# EAGLE board reagnus (EAGLE 9.6.0)
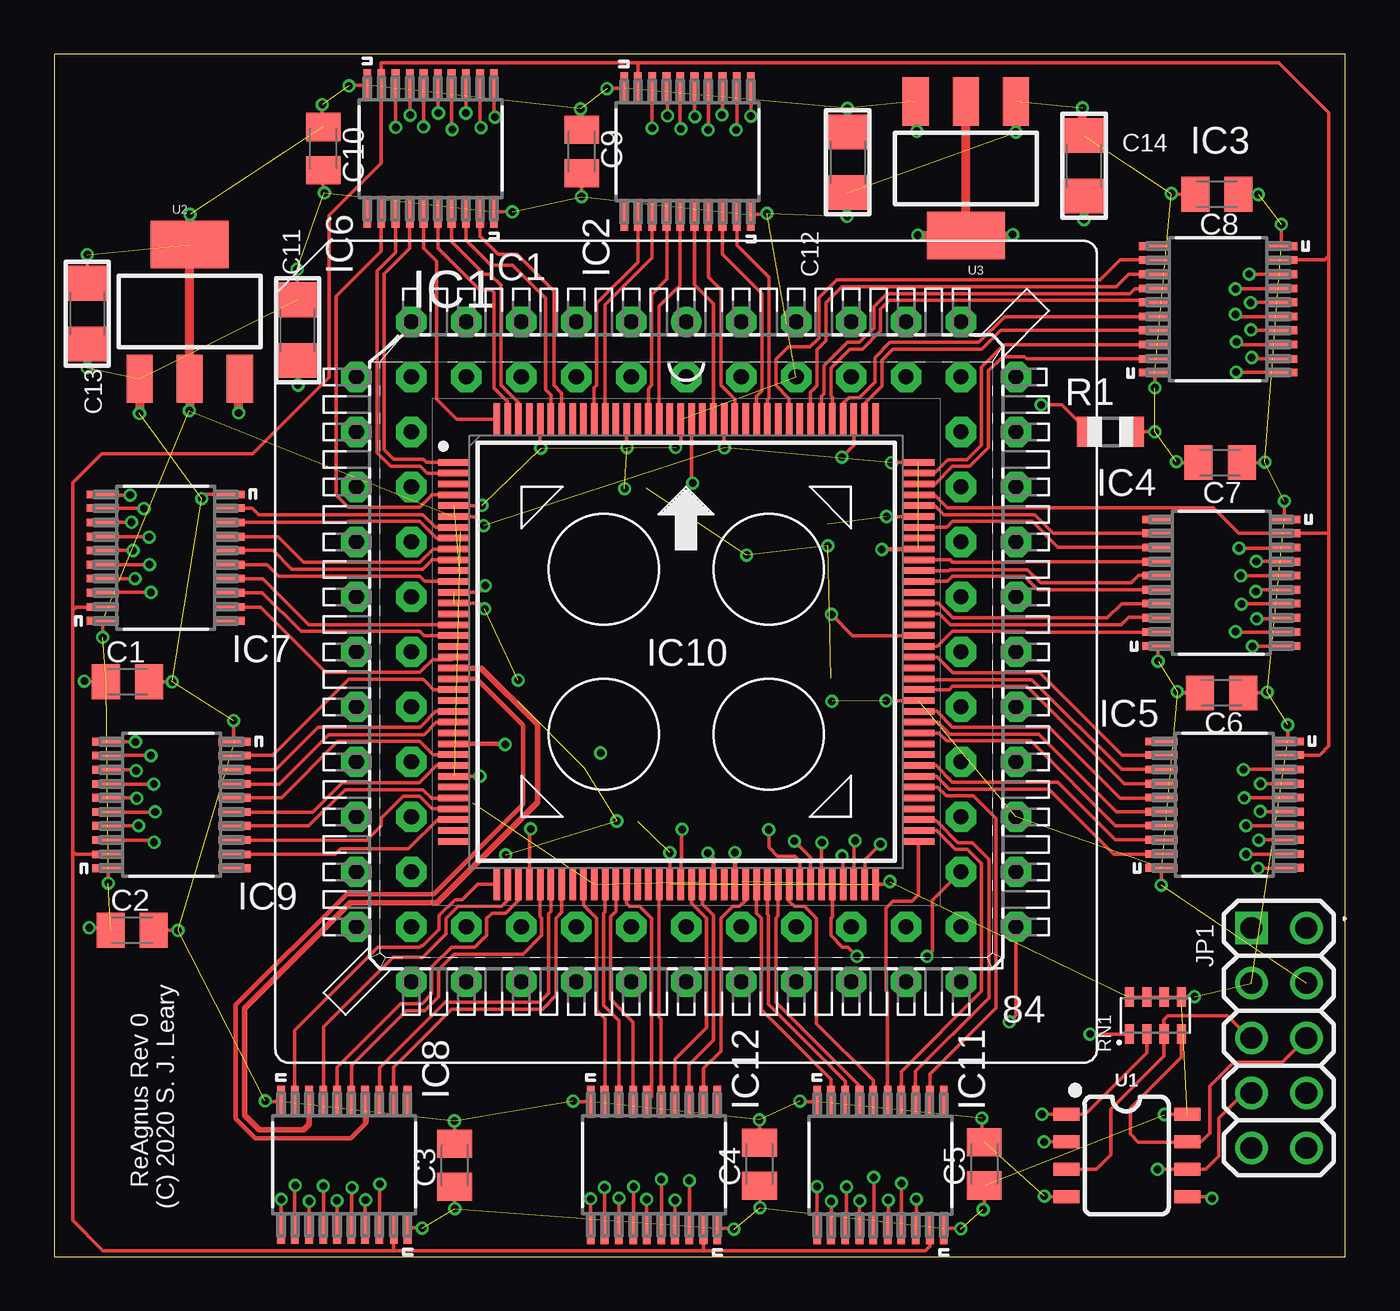
[diagram p0: board, top side]
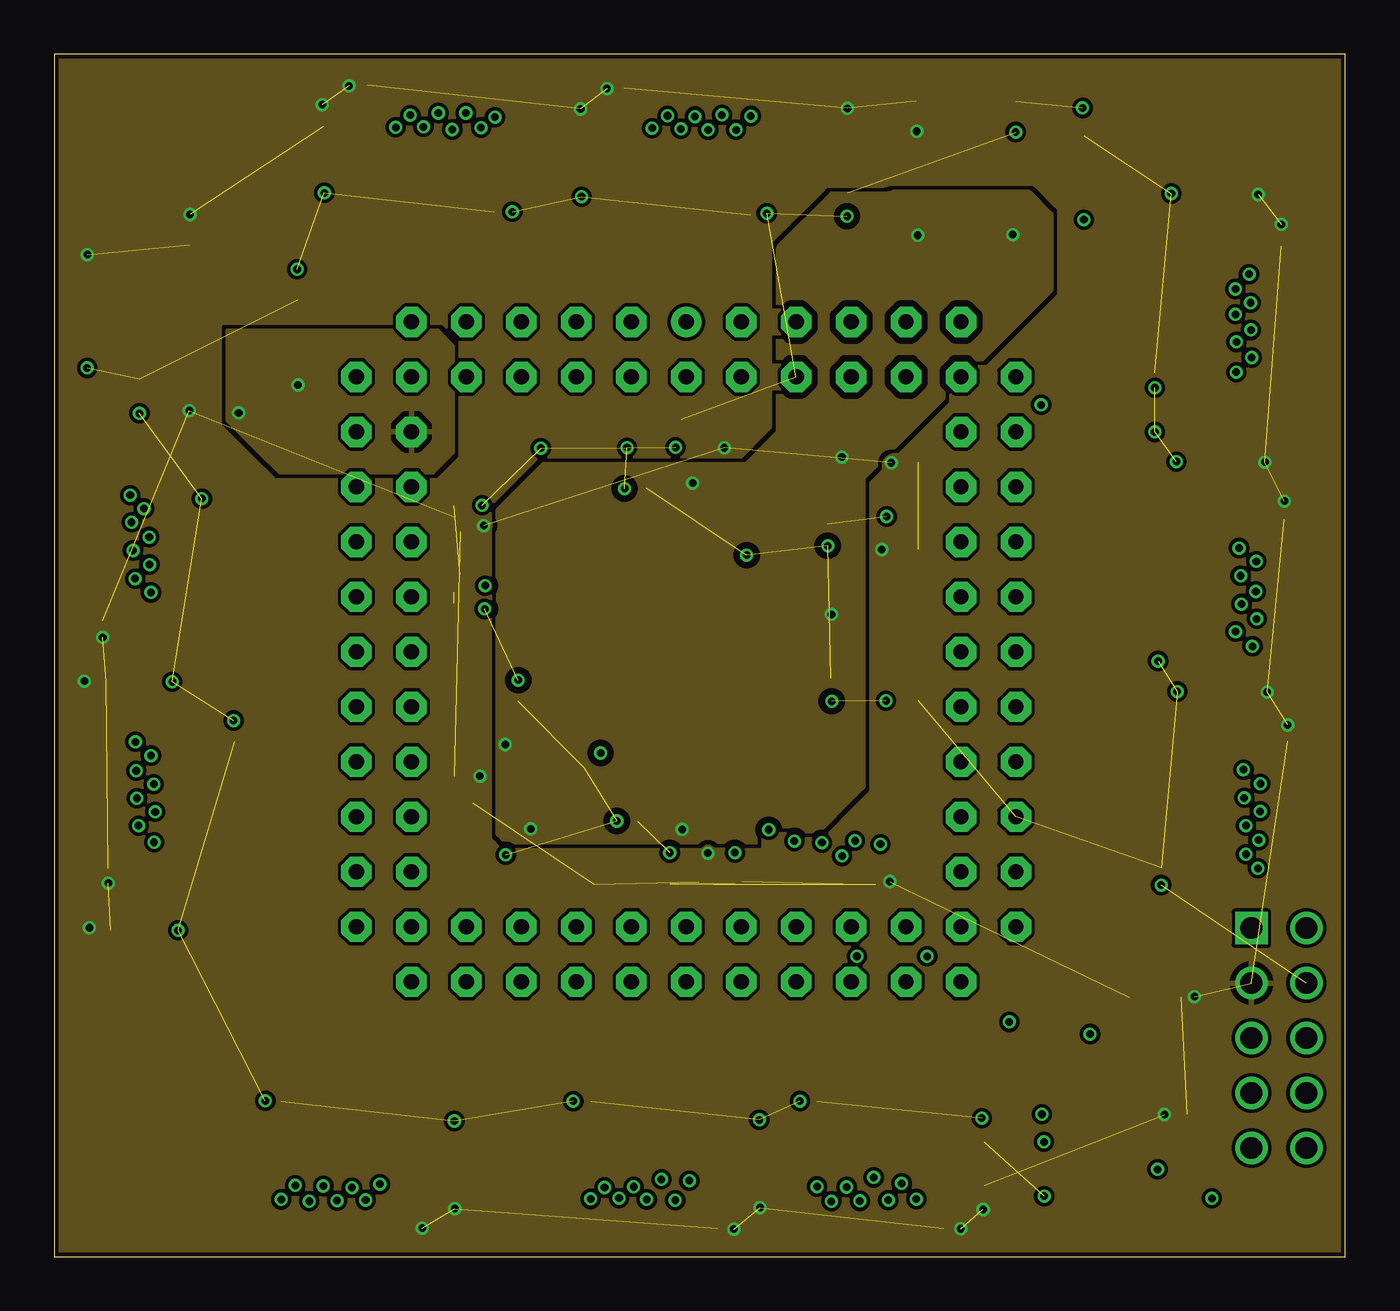
[diagram p1: board, inner layer PWR]
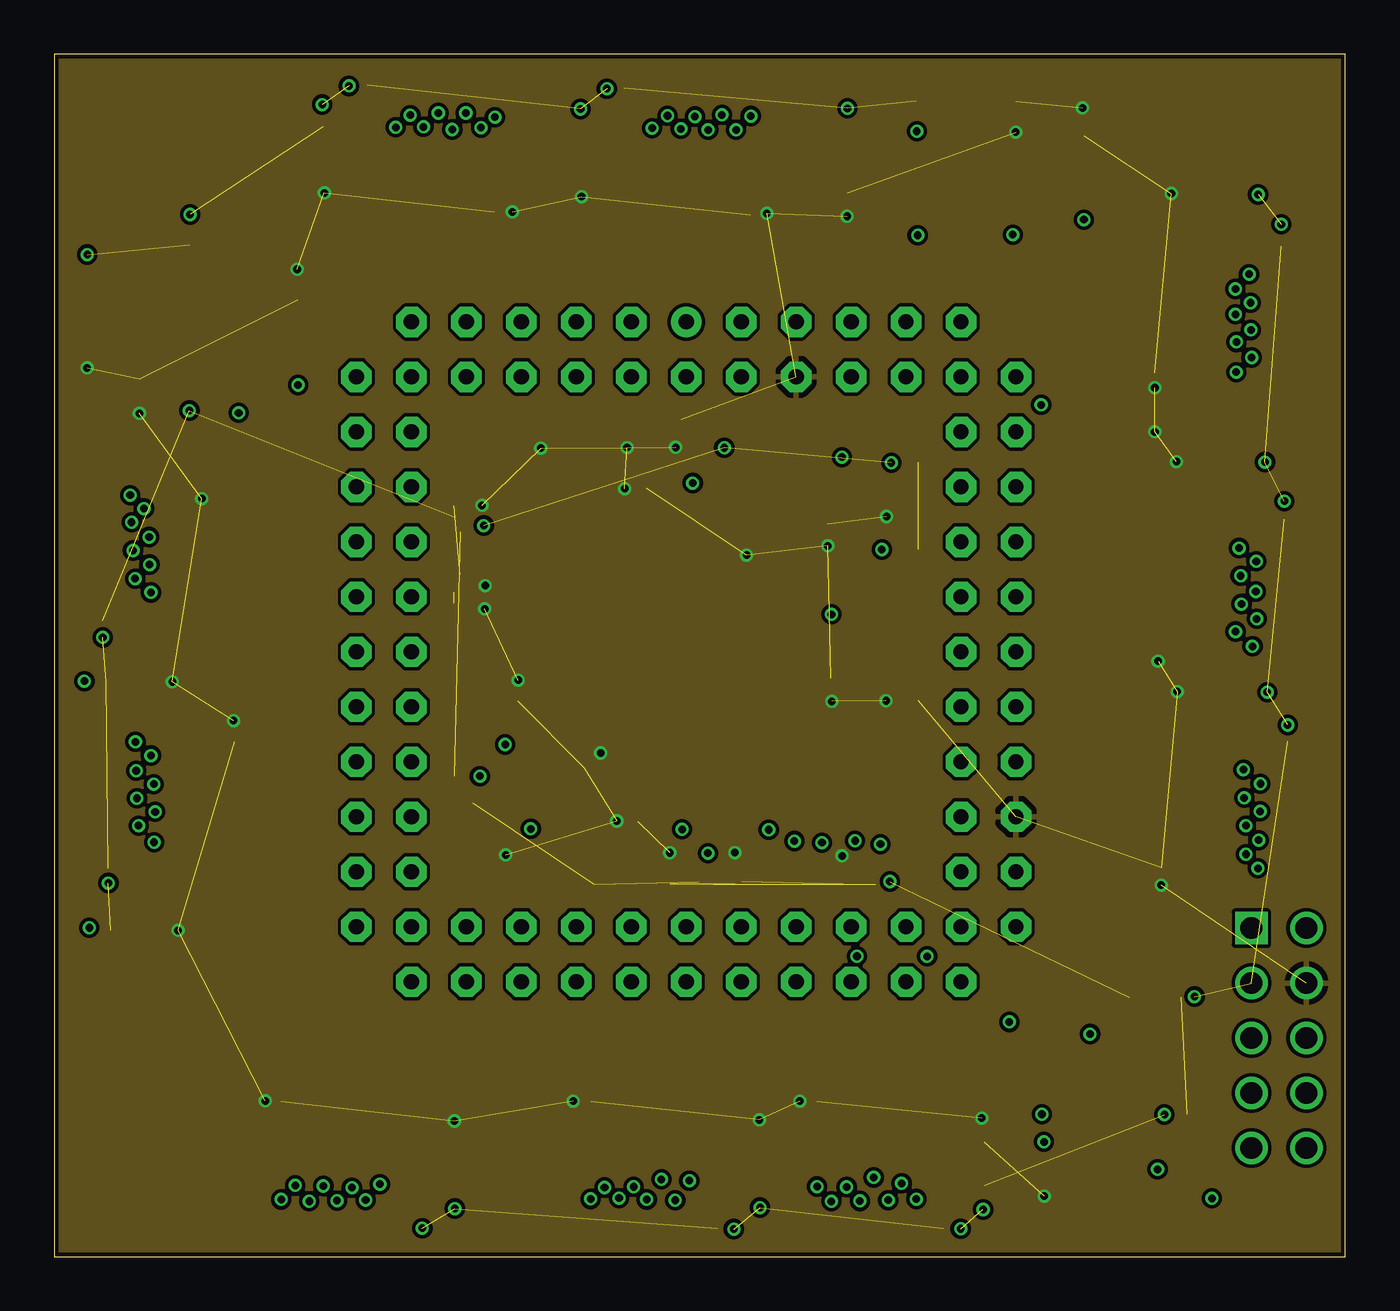
[diagram p2: board, inner layer GND]
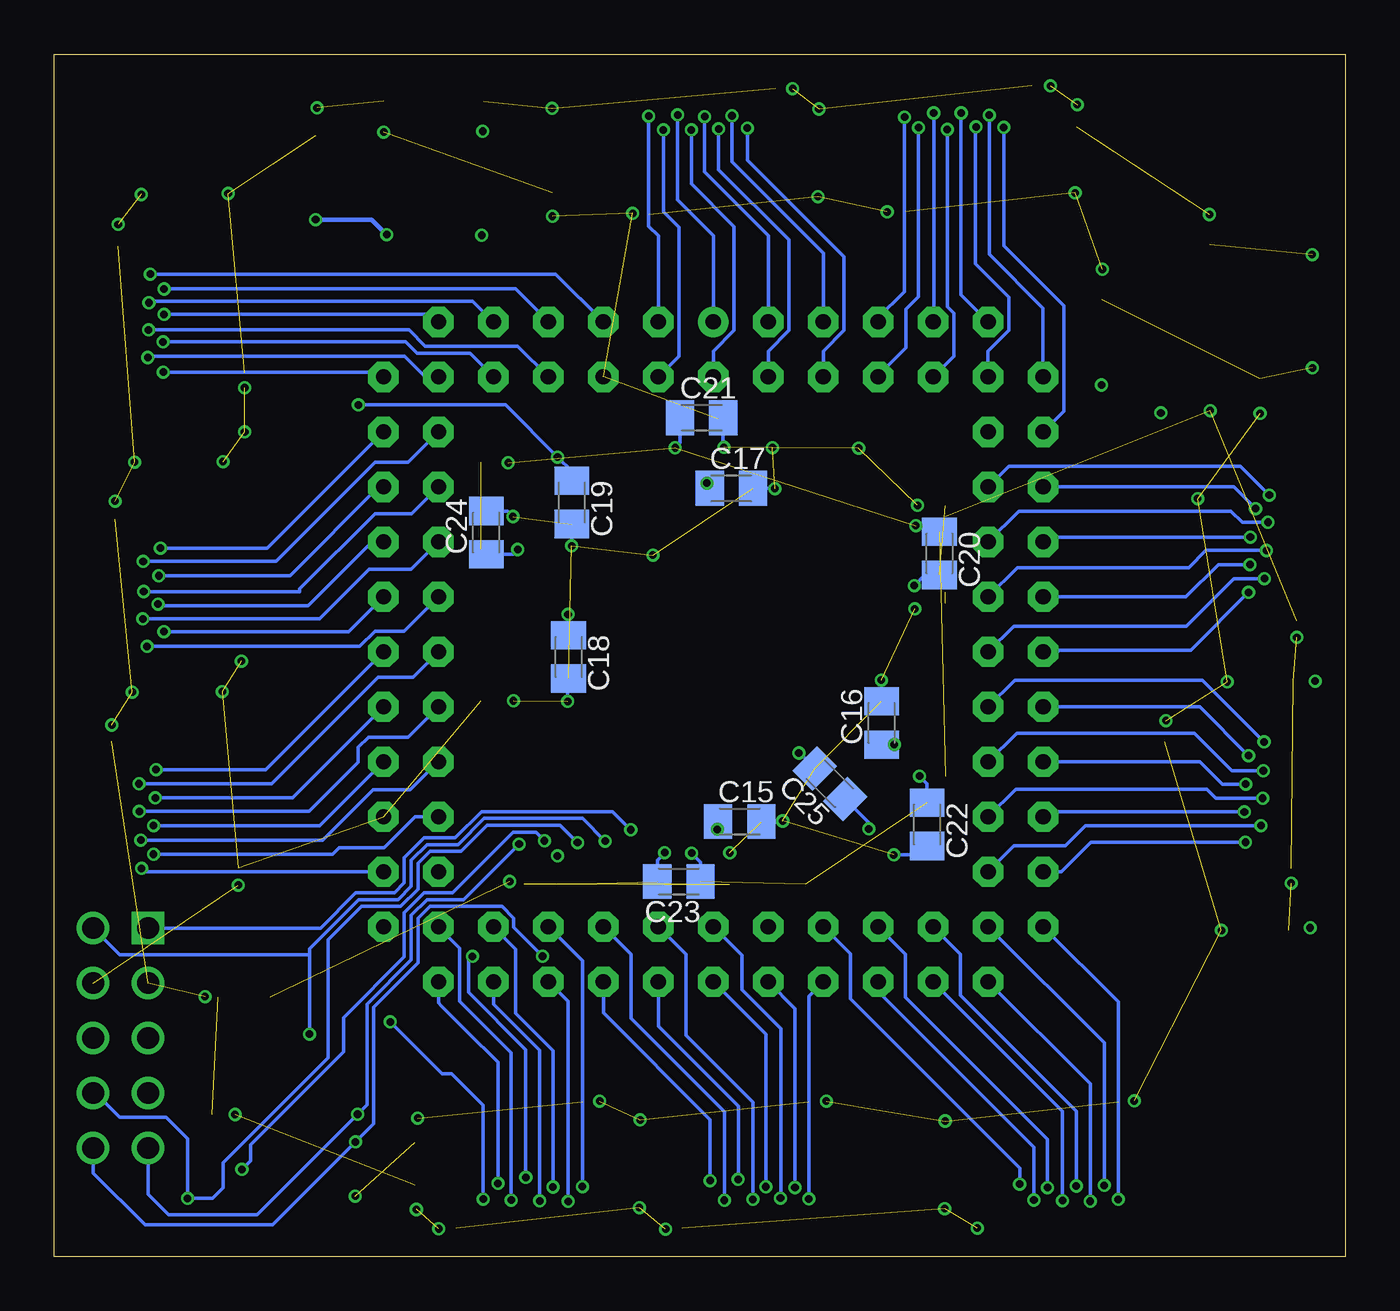
[diagram p3: board, bottom side, seen from below]

Size 59.67 x 55.55 mm. Coordinates in mm from the lower left corner, seen from the top.
Outline: 0,0 59.67,0 59.67,55.55 0,55.55 0,0
Copper layers (1*2*15*16): Top 0.035559375mm / dielectric 1.501140625mm / PWR 0.035559375mm / dielectric 0.149859375mm / GND 0.035559375mm / dielectric 0.200659375mm / Bottom 0.035559375mm
Design rules "jlcpcb-4layer *": minimum track width 5mil, minimum drill 0.2mm, track to track 6.5mil, track to pad 6.5mil, pad to pad 7mil, via to via 7mil, smd to smd 0mil, copper to edge 0.2mm, drill to drill 10mil, minimum pad ring 3mil, minimum via ring 5mil, stop-mask expansion 3mil, vias tented up to drill 0.2mm, thermal gap 10mil

## Footprints (pad centres in the part's own frame; a part is rotated, then mirrored left to right if it is on the bottom)
C0805K = smd 1.3 x 1.6: 1 -1,0; 2 1,0
1206 = smd 1.6 x 1.8: 1 -1.4,0; 2 1.4,0
PLCC84_T = drill 0.7 pad 1.4: 1 0,15.24 | drill 0.7 pad 1.4 octagon: 2 0,12.7; 3 -2.54,15.24; 4 -2.54,12.7; 5 -5.08,15.24; 6 -5.08,12.7; 7 -7.62,15.24; 8 -7.62,12.7; 9 -10.16,15.24; 10 -10.16,12.7; 11 -12.7,15.24; 12 -15.24,12.7; 13 -12.7,12.7; 14 -15.24,10.16; 15 -12.7,10.16; 16 -15.24,7.62; 17 -12.7,7.62; 18 -15.24,5.08; 19 -12.7,5.08; 20 -15.24,2.54; 21 -12.7,2.54; 22 -15.24,0; 23 -12.7,0; 24 -15.24,-2.54; 25 -12.7,-2.54; 26 -15.24,-5.08; 27 -12.7,-5.08; 28 -15.24,-7.62; 29 -12.7,-7.62; 30 -15.24,-10.16; 31 -12.7,-10.16; 32 -15.24,-12.7; 33 -12.7,-15.24; 34 -12.7,-12.7; 35 -10.16,-15.24; 36 -10.16,-12.7; 37 -7.62,-15.24; 38 -7.62,-12.7; 39 -5.08,-15.24; 40 -5.08,-12.7; 41 -2.54,-15.24; 42 -2.54,-12.7; 43 0,-15.24; 44 0,-12.7; 45 2.54,-15.24; 46 2.54,-12.7; 47 5.08,-15.24; 48 5.08,-12.7; 49 7.62,-15.24; 50 7.62,-12.7; 51 10.16,-15.24; 52 10.16,-12.7; 53 12.7,-15.24; 54 15.24,-12.7; 55 12.7,-12.7; 56 15.24,-10.16; 57 12.7,-10.16; 58 15.24,-7.62; 59 12.7,-7.62; 60 15.24,-5.08; 61 12.7,-5.08; 62 15.24,-2.54; 63 12.7,-2.54; 64 15.24,0; 65 12.7,0; 66 15.24,2.54; 67 12.7,2.54; 68 15.24,5.08; 69 12.7,5.08; 70 15.24,7.62; 71 12.7,7.62; 72 15.24,10.16; 73 12.7,10.16; 74 15.24,12.7; 75 12.7,15.24; 76 12.7,12.7; 77 10.16,15.24; 78 10.16,12.7; 79 7.62,15.24; 80 7.62,12.7; 81 5.08,15.24; 82 5.08,12.7; 83 2.54,15.24; 84 2.54,12.7
SOP65P640X120-20N = smd 1.473 x 0.356: 1 -2.921,2.921; 2 -2.921,2.286; 3 -2.921,1.626; 4 -2.921,0.965; 5 -2.921,0.33; 6 -2.921,-0.33; 7 -2.921,-0.965; 8 -2.921,-1.626; 9 -2.921,-2.286; 10 -2.921,-2.921; 11 2.921,-2.921; 12 2.921,-2.286; 13 2.921,-1.626; 14 2.921,-0.965; 15 2.921,-0.33; 16 2.921,0.33; 17 2.921,0.965; 18 2.921,1.626; 19 2.921,2.286; 20 2.921,2.921
QFP50P2200X2200X160-144N = smd 1.475 x 0.3: 1 -10.738,8.75; 2 -10.738,8.25; 3 -10.738,7.75; 4 -10.738,7.25; 5 -10.738,6.75; 6 -10.738,6.25; 7 -10.738,5.75; 8 -10.738,5.25; 9 -10.738,4.75; 10 -10.738,4.25; 11 -10.738,3.75; 12 -10.738,3.25; 13 -10.738,2.75; 14 -10.738,2.25; 15 -10.738,1.75; 16 -10.738,1.25; 17 -10.738,0.75; 18 -10.738,0.25; 19 -10.738,-0.25; 20 -10.738,-0.75; 21 -10.738,-1.25; 22 -10.738,-1.75; 23 -10.738,-2.25; 24 -10.738,-2.75; 25 -10.738,-3.25; 26 -10.738,-3.75; 27 -10.738,-4.25; 28 -10.738,-4.75; 29 -10.738,-5.25; 30 -10.738,-5.75; 31 -10.738,-6.25; 32 -10.738,-6.75; 33 -10.738,-7.25; 34 -10.738,-7.75; 35 -10.738,-8.25; 36 -10.738,-8.75; 73 10.738,-8.75; 74 10.738,-8.25; 75 10.738,-7.75; 76 10.738,-7.25; 77 10.738,-6.75; 78 10.738,-6.25; 79 10.738,-5.75; 80 10.738,-5.25; 81 10.738,-4.75; 82 10.738,-4.25; 83 10.738,-3.75; 84 10.738,-3.25; 85 10.738,-2.75; 86 10.738,-2.25; 87 10.738,-1.75; 88 10.738,-1.25; 89 10.738,-0.75; 90 10.738,-0.25; 91 10.738,0.25; 92 10.738,0.75; 93 10.738,1.25; 94 10.738,1.75; 95 10.738,2.25; 96 10.738,2.75; 97 10.738,3.25; 98 10.738,3.75; 99 10.738,4.25; 100 10.738,4.75; 101 10.738,5.25; 102 10.738,5.75; 103 10.738,6.25; 104 10.738,6.75; 105 10.738,7.25; 106 10.738,7.75; 107 10.738,8.25; 108 10.738,8.75 | smd 0.3 x 1.475: 37 -8.75,-10.738; 38 -8.25,-10.738; 39 -7.75,-10.738; 40 -7.25,-10.738; 41 -6.75,-10.738; 42 -6.25,-10.738; 43 -5.75,-10.738; 44 -5.25,-10.738; 45 -4.75,-10.738; 46 -4.25,-10.738; 47 -3.75,-10.738; 48 -3.25,-10.738; 49 -2.75,-10.738; 50 -2.25,-10.738; 51 -1.75,-10.738; 52 -1.25,-10.738; 53 -0.75,-10.738; 54 -0.25,-10.738; 55 0.25,-10.738; 56 0.75,-10.738; 57 1.25,-10.738; 58 1.75,-10.738; 59 2.25,-10.738; 60 2.75,-10.738; 61 3.25,-10.738; 62 3.75,-10.738; 63 4.25,-10.738; 64 4.75,-10.738; 65 5.25,-10.738; 66 5.75,-10.738; 67 6.25,-10.738; 68 6.75,-10.738; 69 7.25,-10.738; 70 7.75,-10.738; 71 8.25,-10.738; 72 8.75,-10.738; 109 8.75,10.738; 110 8.25,10.738; 111 7.75,10.738; 112 7.25,10.738; 113 6.75,10.738; 114 6.25,10.738; 115 5.75,10.738; 116 5.25,10.738; 117 4.75,10.738; 118 4.25,10.738; 119 3.75,10.738; 120 3.25,10.738; 121 2.75,10.738; 122 2.25,10.738; 123 1.75,10.738; 124 1.25,10.738; 125 0.75,10.738; 126 0.25,10.738; 127 -0.25,10.738; 128 -0.75,10.738; 129 -1.25,10.738; 130 -1.75,10.738; 131 -2.25,10.738; 132 -2.75,10.738; 133 -3.25,10.738; 134 -3.75,10.738; 135 -4.25,10.738; 136 -4.75,10.738; 137 -5.25,10.738; 138 -5.75,10.738; 139 -6.25,10.738; 140 -6.75,10.738; 141 -7.25,10.738; 142 -7.75,10.738; 143 -8.25,10.738; 144 -8.75,10.738
2X05 = drill 1 square: 1 -5.08,-1.27 | drill 1: 2 -5.08,1.27; 3 -2.54,-1.27; 4 -2.54,1.27; 5 0,-1.27; 6 0,1.27; 7 2.54,-1.27; 8 2.54,1.27; 9 5.08,-1.27; 10 5.08,1.27
R0805 = smd 1.1 x 1.4: 1 -1,0; 2 1,0
RESCAXE80P320X160-8N = smd 0.9 x 0.425: 1 -0.85,1.2; 2 -0.85,0.4; 3 -0.85,-0.4; 4 -0.85,-1.2; 5 0.85,-1.2; 6 0.85,-0.4; 7 0.85,0.4; 8 0.85,1.2
SO08 = smd 0.6 x 1.2: 1 -1.905,-2.8; 2 -0.635,-2.8; 3 0.635,-2.8; 4 1.905,-2.8; 5 1.905,2.8; 6 0.635,2.8; 7 -0.635,2.8; 8 -1.905,2.8
SOT223 = smd 1.219 x 2.235: 1 -2.311,-3.099; 2 0,-3.099; 3 2.311,-3.099 | smd 3.6 x 2.2: 4 0,3.099

## Placement (x,y rotation side)
C1  100nF  [C0805K]  3.4,26.56 0 top
C2  100nF  [C0805K]  3.61,15.08 0 top
C3  100nF  [C0805K]  18.51,4.22 90 top
C4  100nF  [C0805K]  32.6,4.27 90 top
C5  100nF  [C0805K]  42.98,4.29 90 top
C6  100nF  [C0805K]  53.95,26.04 180 top
C7  100nF  [C0805K]  53.88,36.68 180 top
C8  100nF  [C0805K]  53.73,49.08 180 top
C9  100nF  [C0805K]  24.38,51.05 270 top
C10  100nF  [C0805K]  12.44,51.19 270 top
C11  10uF  [1206]  11.25,42.8 90 top
C12  10uF  [1206]  36.67,50.56 270 top
C13  10uF  [1206]  1.53,43.56 270 top
C14  10uF  [1206]  47.6,50.39 90 top
C15  [C0805K]  27.99,20.1 0 bottom
C16  [C0805K]  21.43,24.65 90 bottom
C17  [C0805K]  28.37,35.49 0 bottom
C18  [C0805K]  35.9,27.71 270 bottom
C19  [C0805K]  35.75,34.84 270 bottom
C20  [C0805K]  18.76,32.49 270 bottom
C21  [C0805K]  29.75,38.75 0 bottom
C22  [C0805K]  19.33,19.97 270 bottom
C23  [C0805K]  30.8,17.32 180 bottom
C24  [C0805K]  39.7,33.44 90 bottom
C25  [C0805K]  23.82,21.85 135 bottom
IC1  [PLCC84_T]  29.21,27.94 0 top
IC2  SN74CB3T3245PW  [SOP65P640X120-20N]  29.26,51.04 90 top
IC3  SN74CB3T3245PW  [SOP65P640X120-20N]  53.79,43.76 0 top
IC4  SN74CB3T3245PW  [SOP65P640X120-20N]  53.94,31.14 0 top
IC5  SN74CB3T3245PW  [SOP65P640X120-20N]  54.08,20.88 0 top
IC6  SN74CB3T3245PW  [SOP65P640X120-20N]  17.4,51.19 90 top
IC7  SN74CB3T3245PW  [SOP65P640X120-20N]  5.16,32.29 180 top
IC8  SN74CB3T3245PW  [SOP65P640X120-20N]  13.41,4.25 270 top
IC9  SN74CB3T3245PW  [SOP65P640X120-20N]  5.43,20.87 180 top
IC10  ICE40HX4K-TQ144  [QFP50P2200X2200X160-144N]  29.21,27.94 0 top
IC11  SN74CB3T3245PW  [SOP65P640X120-20N]  38.18,4.23 270 top
IC12  SN74CB3T3245PW  [SOP65P640X120-20N]  27.72,4.24 270 top
JP1  [2X05]  56.6,10.1 270 top
R1  100K  [R0805]  48.81,38.11 180 top
RN1  CAY16-103J4LF  [RESCAXE80P320X160-8N]  50.89,11.14 90 top
U1  32M SPI Flash  [SO08]  49.57,4.67 270 top
U2  3.3V  [SOT223]  6.27,43.65 0 top
U3  1.2V  [SOT223]  42.13,50.26 180 top

## Library data of the parts
C1-C10 C15-C25 = rcl; SPICEPREFIX: C
C11-C14 JP1 = microbuilder
IC1 = Amiga
IC2-IC9 IC11 IC12 = SN74CB3T3245PW; DESCRIPTION: Texas Instruments SN74CB3T3245PW, Bus Switch, 8 x 1:1, 2.3 3.6 V, 20-Pin TSSOP; HEIGHT: mm; MANUFACTURER_NAME: Texas Instruments; MANUFACTURER_PART_NUMBER: SN74CB3T3245PW; MOUSER_PART_NUMBER: 595-SN74CB3T3245PW; MOUSER_PRICE-STOCK: https://www.mouser.co.uk/ProductDetail/Texas-Instruments/SN74CB3T3245PW?qs=mE33ZKBHyE7%252Bfbhk796%252BPQ%3D%3D
IC10 = tf4060; DESCRIPTION: FPGA - Field Programmable Gate Array; HEIGHT: 1.6mm; MANUFACTURER_NAME: Lattice Semiconductor; MANUFACTURER_PART_NUMBER: iCE40HX4K-TQ144; MOUSER_PART_NUMBER: 842-ICE40HX4K-TQ144; MOUSER_PRICE-STOCK: https://www.mouser.com/Search/Refine.aspx?Keyword=842-ICE40HX4K-TQ144
R1 = A3660
RN1 = tf4060; AVAILABILITY: Good; DESCRIPTION: Res Thick Film Array 10K Ohm 5% ?200ppm/C ISOL Molded 8-Pin 1206(4 X 0603) Convex SMD Paper T/R; MF: Bourns; MP: CAY16-103J4LF; PACKAGE: 1206 Bourns; PRICE: 0.02 USD
U1 = SparkFun-IC-Memory; PROD_ID: N/A
U2 U3 = SparkFun-IC-Power; PROD_ID: VREG-08170

## Nets
!AS: IC1.24 IC9.12
!BLISS: IC1.19 IC7.13
!CASL: IC1.54 IC11.18
!CASU: IC1.55 IC11.16
!CDAC: IC1.37 IC8.17
!CSYNC: IC1.80 IC3.14
!F_AS: IC9.8 IC10.24
!F_BLISS: IC7.7 IC10.9
!F_CASL: IC10.78 IC11.2
!F_CASU: IC10.74 IC11.4
!F_CDAC: IC8.3 IC10.42
!F_CSYNC: IC3.6 IC10.112
!F_HSYNC: IC3.2 IC10.117
!F_INTR: IC7.9 IC10.7
!F_LDS: IC10.63 IC11.7
!F_LPEN: IC3.7 IC10.110
!F_RAMEN: IC9.9 IC10.22
!F_RAS: IC10.73 IC11.5
!F_REGEN: IC7.3 IC10.17
!F_RESET: IC7.8 IC10.8
!F_UDS: IC10.75 IC11.3
!F_VSYNC: IC3.3 IC10.115
!F_WE: IC7.5 IC10.12
!F_XCLKEN: IC8.6 IC10.39
!HOLD: JP1.6 RN1.4 U1.7
!HSYNC: IC1.81 IC3.18
!INTR: IC1.17 IC7.11
!LDS: IC1.52 IC11.13
!LPEN: IC1.78 IC3.13
!RAMEN: IC1.25 IC9.11
!RAS: IC1.57 IC11.15
!REGEN: IC1.23 IC7.17
!RESET: IC1.16 IC7.12
!UDS: IC1.53 IC11.17
!VSYNC: IC1.79 IC3.17
!WE: IC1.21 IC7.15
!WP: JP1.5 RN1.3 U1.3
!XCLKEN: IC1.36 IC8.14
A1: IC1.60 IC5.14
A2: IC1.61 IC5.13
A3: IC1.62 IC5.16
A4: IC1.63 IC5.15
A5: IC1.64 IC5.18
A6: IC1.65 IC5.17
A7: IC1.66 IC4.12
A8: IC1.67 IC4.11
A9: IC1.68 IC4.14
A10: IC1.69 IC4.13
A11: IC1.70 IC4.16
A12: IC1.71 IC4.15
A13: IC1.72 IC4.18
A14: IC1.73 IC4.17
A15: IC1.74 IC3.11
A16: IC1.75 IC3.15
A17: IC1.76 IC3.12
A18: IC1.77 IC3.16
A19: IC1.59 IC5.12
A20: IC1.35 IC8.15
BLIT: IC1.20 IC7.16
BUSEN: IC2.19 IC3.19 IC4.19 IC5.19 IC6.19 IC7.19 IC8.19 IC9.19 IC10.105 IC11.19 IC12.19
CCK: IC1.40 IC8.18
CCKQ: IC1.39 IC12.11
CDONE: IC10.65 JP1.1
CLK7M: IC1.38 IC8.16
CLK28M: IC1.34 IC8.12
CRESET_B: IC10.66 JP1.2 RN1.1
DMAL: IC1.18 IC7.14
DRA0: IC1.43 IC12.14
DRA1: IC1.44 IC12.13
DRA2: IC1.45 IC12.16
DRA3: IC1.46 IC12.15
DRA4: IC1.47 IC12.18
DRA5: IC1.48 IC12.17
DRA6: IC1.49 IC11.12
DRA7: IC1.50 IC11.11
DRA8: IC1.51 IC11.14
DRA9: IC1.56 IC5.11
DRD0: IC1.14 IC6.18
DRD1: IC1.13 IC6.16
DRD2: IC1.12 IC6.17
DRD3: IC1.11 IC6.15
DRD4: IC1.10 IC6.14
DRD5: IC1.9 IC6.13
DRD6: IC1.8 IC6.12
DRD7: IC1.7 IC6.11
DRD8: IC1.6 IC2.18
DRD9: IC1.5 IC2.17
DRD10: IC1.4 IC2.16
DRD11: IC1.3 IC2.15
DRD12: IC1.2 IC2.14
DRD13: IC1.1 IC2.13
DRD14: IC1.84 IC2.12
DRD15: IC1.83 IC2.11
F_A1: IC5.6 IC10.84
F_A2: IC5.7 IC10.83
F_A3: IC5.4 IC10.87
F_A4: IC5.5 IC10.85
F_A5: IC5.2 IC10.90
F_A6: IC5.3 IC10.88
F_A7: IC4.8 IC10.94
F_A8: IC4.9 IC10.91
F_A9: IC4.6 IC10.97
F_A10: IC4.7 IC10.95
F_A11: IC4.4 IC10.99
F_A12: IC4.5 IC10.98
F_A13: IC4.2 IC10.104
F_A14: IC4.3 IC10.102
F_A15: IC3.9 IC10.106
F_A16: IC3.5 IC10.113
F_A17: IC3.8 IC10.107
F_A18: IC3.4 IC10.114
F_A19: IC5.8 IC10.80
F_A20: IC8.5 IC10.41
F_BLIT: IC7.4 IC10.16
F_CCK: IC8.2 IC10.43
F_CCKQ: IC10.45 IC12.9
F_CLK7M: IC8.4 IC10.21
F_CLK28M: IC8.8 IC10.20
F_DMAL: IC7.6 IC10.10
F_DRA0: IC10.49 IC12.6
F_DRA1: IC10.48 IC12.7
F_DRA2: IC10.55 IC12.4
F_DRA3: IC10.52 IC12.5
F_DRA4: IC10.60 IC12.2
F_DRA5: IC10.56 IC12.3
F_DRA6: IC10.62 IC11.8
F_DRA7: IC10.61 IC11.9
F_DRA8: IC10.64 IC11.6
F_DRA9: IC5.9 IC10.79
F_DRD0: IC6.2 IC10.4
F_DRD1: IC6.3 IC10.2
F_DRD2: IC6.4 IC10.1
F_DRD3: IC6.5 IC10.144
F_DRD4: IC6.6 IC10.143
F_DRD5: IC6.7 IC10.142
F_DRD6: IC6.8 IC10.139
F_DRD7: IC6.9 IC10.138
F_DRD8: IC2.2 IC10.135
F_DRD9: IC2.3 IC10.134
F_DRD10: IC2.4 IC10.130
F_DRD11: IC2.5 IC10.129
F_DRD12: IC2.6 IC10.124
F_DRD13: IC2.7 IC10.122
F_DRD14: IC2.8 IC10.120
F_DRD15: IC2.9 IC10.119
F_PAL_NTSC: IC10.47 IC12.8
F_RGA1: IC8.7 IC10.38
F_RGA2: IC8.9 IC10.37
F_RGA3: IC9.3 IC10.33
F_RGA4: IC9.2 IC10.34
F_RGA5: IC9.5 IC10.29
F_RGA6: IC9.4 IC10.32
F_RGA7: IC9.7 IC10.25
F_RGA8: IC9.6 IC10.28
F_RW: IC7.2 IC10.19
GND: C1.2 C2.2 C3.2 C4.2 C5.2 C6.2 C7.2 C8.2 C9.2 C10.2 C11.2 C12.2 C13.2 C14.2 C15.2 C16.2 C17.2 C18.2 C19.2 C20.2 C21.2 C22.2 C23.2 C24.2 C25.2 IC1.58 IC1.82 IC2.10 IC3.10 IC4.10 IC5.10 IC6.10 IC7.10 IC8.10 IC9.10 IC10.5 IC10.13 IC10.14 IC10.53 IC10.59 IC10.69 IC10.86 IC10.103 IC10.127 IC10.132 IC10.140 IC11.10 IC12.10 JP1.4 R1.1 U1.4 U2.1 U3.1
PAL_NTSC: IC1.41 IC12.12
RGA1: IC1.33 IC8.13
RGA2: IC1.32 IC8.11
RGA3: IC1.31 IC9.17
RGA4: IC1.30 IC9.18
RGA5: IC1.29 IC9.15
RGA6: IC1.28 IC9.16
RGA7: IC1.27 IC9.13
RGA8: IC1.26 IC9.14
RW: IC1.22 IC7.18
SCK: IC10.70 JP1.7 U1.6
SDI: IC10.68 JP1.10 U1.2
SDO: IC10.67 JP1.8 U1.5
SS: IC10.71 JP1.9 RN1.2 U1.1
VCC1.2V: C14.1 C15.1 C16.1 C17.1 C18.1 C19.1 C25.1 IC10.27 IC10.40 IC10.54 IC10.92 IC10.111 IC10.126 R1.2 U3.2 U3.4
VCC3.3V: C1.1 C2.1 C3.1 C4.1 C5.1 C6.1 C7.1 C8.1 C9.1 C10.1 C12.1 C13.1 C20.1 C21.1 C22.1 C23.1 C24.1 IC2.20 IC3.20 IC4.20 IC5.20 IC6.20 IC7.20 IC8.20 IC9.20 IC10.6 IC10.30 IC10.46 IC10.57 IC10.72 IC10.100 IC10.108 IC10.123 IC11.20 IC12.20 JP1.3 RN1.5 RN1.6 RN1.7 RN1.8 U1.8 U2.2 U2.4 U3.3
VCC5V: C11.1 IC1.15 U2.3
VSS1: IC1.42

## Tracks (layer width: path | path; a pad name or v marks a point on that pad's centre or on a via)
!AS  (via drill 0.35)
  Top 0.152: IC9.12 v4.47,23.15 v4.48,23.15
  Bottom 0.152: v4.48,23.15 6.73,25.4 IC1.24
!BLISS  (via drill 0.35)
  Top 0.152: v3.58,33.92 IC7.13
  Bottom 0.152: v3.58,33.92 4.77,33.92 5.29,34.44 15.09,34.44 IC1.19
!CASL  (via drill 0.35)
  Top 0.152: v39.84,2.66 39.84,1.34 IC11.18 | IC1.54 44.45,11.15 v44.14,10.84
  Bottom 0.152: v39.84,2.66 39.84,6.99 41.3,8.45 41.75,8.45 v44.14,10.84
!CASU  (via drill 0.35)
  Top 0.152: v38.55,2.61 38.55,1.34 IC11.16
  Bottom 0.152: IC1.55 40.92,14.25 40.92,11.79 38.55,9.42 v38.55,2.61
!CDAC  (via drill 0.35)
  Top 0.152: IC8.17 14.38,2.6 v14.4,2.62
  Bottom 0.152: v14.4,2.62 14.4,5.06 21.59,12.26 IC1.37
!CSYNC  (via drill 0.35)
  Top 0.152: IC3.14 55.32,42.79 v55.3,42.81
  Bottom 0.152: v55.3,42.81 43.27,42.81 42.52,42.06 38.25,42.06 IC1.80
!F_AS
  Top 0.152: IC9.8 10.24,22.49 12.2,24.46 16.91,24.46 17.64,25.19 IC10.24
!F_BLISS
  Top 0.152: IC7.7 10.36,33.26 11.54,32.08 16.9,32.08 17.51,32.69 IC10.9
!F_CASL
  Top 0.152: IC11.2 40.47,8.43 43.51,11.47 43.51,20.26 42.48,21.28 41.23,21.28 40.83,21.69 IC10.78
!F_CASU
  Top 0.152: IC11.4 39.15,8.55 42.85,12.25 42.85,18.17 42.21,18.81 41.64,18.81 40.76,19.69 IC10.74
!F_CDAC
  Top 0.152: IC8.3 15.04,8.72 18.08,11.76 22.43,11.76 22.85,12.18 22.85,15.84 22.96,15.95 IC10.42
!F_CSYNC
  Top 0.152: IC10.112 36.46,39.42 36.72,39.69 37.23,39.69 37.93,40.39 37.93,41.53 38.63,42.23 42.73,42.23 43.93,43.43 IC3.6
!F_HSYNC
  Top 0.152: IC10.117 33.96,39.64 33.35,40.25 33.35,41.45 33.93,42.03 34.94,42.03 35.34,42.43 35.34,44.3 36.17,45.12 48.34,45.12 49.26,46.04 IC3.2
!F_INTR
  Top 0.152: IC7.9 9.14,34.58 9.44,34.28 17.03,34.28 17.62,33.69 IC10.7
!F_LDS
  Top 0.152: IC10.63 33.46,15.74 33.35,15.63 33.35,11.76 37.22,7.89 IC11.7
!F_LPEN
  Top 0.152: IC10.110 37.46,39.42 38.24,40.21 38.24,41.4 38.76,41.91 42.87,41.91 43.74,42.79 IC3.7
!F_RAMEN
  Top 0.152: IC9.9 10.09,23.15 13.62,26.68 17.05,26.68 17.54,26.19 IC10.22
!F_RAS
  Top 0.152: IC11.5 38.51,12.23 38.43,12.31 38.43,16.08 38.76,16.41 39.65,16.41 39.95,16.71 IC10.73
!F_REGEN
  Top 0.152: IC10.17 17.09,28.69 16.9,28.88 11.41,28.88 9.62,30.67 IC7.3
!F_RESET
  Top 0.152: IC7.8 13.54,33.92 13.58,33.96 16.9,33.96 17.67,33.19 IC10.8
!F_UDS
  Top 0.152: IC11.3 39.81,8.56 43.19,11.94 43.19,18.36 42.43,19.13 41.77,19.13 40.86,20.04 40.82,20.08 40.71,20.19 IC10.75
!F_VSYNC
  Top 0.152: IC10.115 34.96,39.94 35.25,40.23 35.25,41.9 35.66,42.3 35.66,44.05 36.41,44.81 49.09,44.81 49.66,45.38 IC3.3
!F_WE
  Top 0.152: IC7.5 9.84,31.96 10.38,31.42 16.9,31.42 17.13,31.19 IC10.12
!F_XCLKEN
  Top 0.152: IC8.6 13.08,8.76 16,11.68 16.99,11.68 17.45,12.13 17.45,13.39 18.36,14.3 19.44,14.3 19.99,14.85 19.99,15.62 20.23,15.86 20.85,15.86 21.46,16.47 IC10.39
!HOLD
  Top 0.152: RN1.4 52.09,9.22 49.72,6.85 49.72,5.67 50.1,5.29 52.35,5.29 U1.7 53.02,5.31 53.41,5.7 53.41,7.88 54.52,8.99 56.75,8.99 JP1.6
!HSYNC  (via drill 0.35)
  Top 0.152: v55.22,45.39 IC3.18
  Bottom 0.152: v55.22,45.39 36.5,45.39 IC1.81
!INTR  (via drill 0.35)
  Top 0.152: v3.52,35.18 2.27,35.18 IC7.11
  Bottom 0.152: IC1.17 15.56,36.51 4.85,36.51 v3.52,35.18
!LDS  (via drill 0.35)
  Top 0.152: v36.62,3.22 36.62,1.37 IC11.13
  Bottom 0.152: IC1.52 38.34,14.21 38.34,11.24 36.62,9.52 v36.62,3.22
!LPEN  (via drill 0.35)
  Top 0.152: IC3.13 54.76,42.13 v54.63,42.25
  Bottom 0.152: IC1.78 40.46,41.73 42.91,41.73 43.43,42.25 v54.63,42.25
!RAMEN  (via drill 0.35)
  Top 0.152: v3.76,23.78 IC9.11
  Bottom 0.152: IC1.25 15.28,26.63 6.61,26.63 v3.76,23.78
!RAS  (via drill 0.35)
  Top 0.152: v37.87,3.66 37.87,1.33 IC11.15 | IC1.57 40.59,16.46 40.59,14.12 v40.34,13.88
  Bottom 0.152: v37.87,3.66 37.87,9.57 40.52,12.21 40.52,13.7 v40.34,13.88
!REGEN  (via drill 0.35)
  Top 0.152: IC7.17 v3.74,31.33 v3.74,31.32
  Bottom 0.152: IC1.23 15.32,29.13 7.36,29.13 5.17,31.32 v3.74,31.32
!RESET  (via drill 0.35)
  Top 0.152: IC7.12 4.13,34.58 v4.15,34.56
  Bottom 0.152: v4.15,34.56 5.15,35.56 IC1.16
!UDS  (via drill 0.35)
  Top 0.152: v39.16,3.39 39.16,1.32 IC11.17
  Bottom 0.152: IC1.53 41.91,11.72 41.89,11.7 41.8,11.62 40.6,10.42 39.16,8.98 v39.16,3.39
!VSYNC  (via drill 0.35)
  Top 0.152: v54.59,44.7 56.69,44.7 IC3.17
  Bottom 0.152: IC1.79 38.35,44.7 v54.59,44.7
!WE  (via drill 0.35)
  Top 0.152: IC7.15 v3.65,32.62
  Bottom 0.152: v3.65,32.62 6.44,32.62 7.24,31.82 15.17,31.82 IC1.21
!WP
  Top 0.152: U1.3 48.17,4.04 48.84,4.71 48.84,6.8 51.29,9.25 RN1.3 51.29,10.95 51.47,11.12 54.21,11.12 55.02,10.31 55.09,10.24 55.23,10.1 JP1.5
!XCLKEN  (via drill 0.35)
  Top 0.152: IC8.14 v12.45,3.26 v12.44,3.26
  Bottom 0.152: v12.44,3.26 12.44,6.72 17.79,12.07 17.79,13.98 IC1.36
A1  (via drill 0.35)
  Top 0.152: v55.07,19.91 56.99,19.91 IC5.14
  Bottom 0.152: IC1.60 47.4,19.91 v55.07,19.91
A2  (via drill 0.35)
  Top 0.152: IC5.13 55.67,19.26 v55.66,19.24
  Bottom 0.152: v55.66,19.24 47.25,19.24 44.93,21.57 43.21,21.57 IC1.61
A3  (via drill 0.35)
  Top 0.152: v54.99,21.19 56.98,21.19 IC5.16
  Bottom 0.152: IC1.62 48.66,21.19 v54.99,21.19
A4  (via drill 0.35)
  Top 0.152: IC5.15 55.75,20.55 v55.73,20.57
  Bottom 0.152: IC1.63 43.31,24 45.14,24 45.61,23.52 45.61,22.85 47.89,20.57 v55.73,20.57
A5  (via drill 0.35)
  Top 0.152: IC5.18 54.97,22.51 v54.96,22.5
  Bottom 0.152: v54.96,22.5 49.89,22.5 IC1.64
A6  (via drill 0.35)
  Top 0.152: IC5.17 v55.74,21.85
  Bottom 0.152: IC1.65 43.09,26.76 44.7,26.76 49.61,21.85 v55.74,21.85
A7  (via drill 0.35)
  Top 0.152: IC4.12 54.62,28.85 v54.59,28.88
  Bottom 0.152: v54.59,28.88 46.05,28.88 IC1.66
A8  (via drill 0.35)
  Top 0.152: v55.38,28.19 56.83,28.19 IC4.11
  Bottom 0.152: IC1.67 43.5,28.89 44.84,28.89 45.55,28.19 v55.38,28.19
A9  (via drill 0.35)
  Top 0.152: IC4.14 54.89,30.17 v54.87,30.15
  Bottom 0.152: IC1.68 44.98,33.02 47.93,30.07 54.79,30.07 v54.87,30.15
A10  (via drill 0.35)
  Top 0.152: v55.57,29.46 56.81,29.46 IC4.13
  Bottom 0.152: IC1.69 43.18,31.75 45.12,31.75 47.41,29.46 v55.57,29.46
A11  (via drill 0.35)
  Top 0.152: v54.83,31.45 56.85,31.45 IC4.16
  Bottom 0.152: IC1.70 44.67,35.56 48.77,31.45 v54.83,31.45
A12  (via drill 0.35)
  Top 0.152: v55.53,30.73 55.61,30.8 IC4.15
  Bottom 0.152: IC1.71 43.14,34.33 44.85,34.33 48.32,30.85 48.32,30.71 55.52,30.71 v55.53,30.73
A13  (via drill 0.35)
  Top 0.152: v54.76,32.73 56.83,32.73 IC4.18
  Bottom 0.152: IC1.72 49.82,32.73 v54.76,32.73
A14  (via drill 0.35)
  Top 0.152: v55.55,32.12 56.84,32.12 IC4.17
  Bottom 0.152: IC1.73 43.32,36.69 44.84,36.69 49.41,32.12 v55.55,32.12
A15  (via drill 0.35)
  Top 0.152: v54.62,40.86 56.69,40.86 IC3.11
  Bottom 0.152: IC1.74 44.67,40.86 50.88,40.86 v54.62,40.86
A16  (via drill 0.35)
  Top 0.152: IC3.15 54.69,43.43 v54.59,43.53
  Bottom 0.152: IC1.75 42.26,43.53 v54.59,43.53
A17  (via drill 0.35)
  Top 0.152: IC3.12 55.4,41.47 v55.34,41.54
  Bottom 0.152: IC1.76 42.53,40.64 43.48,41.59 55.22,41.59 55.28,41.54 v55.34,41.54
A18  (via drill 0.35)
  Top 0.152: v55.29,44.07 55.31,44.09 IC3.16
  Bottom 0.152: v55.29,44.07 55.21,44.14 40.33,44.14 IC1.77
A19  (via drill 0.35)
  Top 0.152: v55.07,18.59 IC5.12
  Bottom 0.152: v55.07,18.59 46.8,18.59 46.49,18.9 44.41,18.9 42.99,20.32 IC1.59
A20  (via drill 0.35)
  Top 0.152: IC8.15 v13.08,2.58 v13.08,2.59
  Bottom 0.152: v13.08,2.59 13.08,6.73 IC1.35
BLIT  (via drill 0.35)
  Top 0.152: v4.41,31.97 IC7.16
  Bottom 0.152: v4.41,31.97 5.87,31.97 7.36,30.48 IC1.20
BUSEN
  Top 0.152: IC7.19 1.01,30.01 0.85,29.84 | 0.85,29.84 0.85,18.72 | 0.85,18.72 0.85,1.68 2.25,0.28 15.75,0.28 | 15.75,0.28 30,0.28 | 30,0.28 40.26,0.28 40.47,0.49 IC11.19 | IC12.19 30,1.31 30,0.28 | IC8.19 15.7,0.33 15.75,0.28 | IC9.19 0.99,18.58 0.85,18.72 | 0.85,29.84 0.85,35.74 2.2,37.1 9.18,37.1 12.71,40.63 12.71,48.1 15.12,50.51 IC6.19 15.12,55.15 15.13,55.16 26.98,55.16 | 58.91,46.24 58.91,33.49 | 58.91,33.49 58.91,23.61 58.48,23.17 IC5.19 | 58.91,33.49 58.85,33.42 IC4.19 54.74,33.42 53.57,34.6 41.27,34.6 40.68,35.19 IC10.105 | IC3.19 58.72,46.04 58.91,46.24 | IC2.19 26.98,55.16 | 26.98,55.16 56.59,55.16 58.91,52.84 58.91,46.24
CCK  (via drill 0.35)
  Top 0.152: IC8.18 15.04,3.33 v15.05,3.35
  Bottom 0.152: IC1.40 22.87,13.98 22.87,11.91 21.35,10.39 15.05,4.09 v15.05,3.35
CCKQ  (via drill 0.35)
  Top 0.152: v24.79,2.67 IC12.11
  Bottom 0.152: v24.79,2.67 24.79,12.04 IC1.39
CDONE  (via drill 0.35)
  Top 0.152: IC10.65 34.46,18.27 34.23,18.5 33.43,18.5 33.02,18.9 v33.02,19.72
  Bottom 0.152: JP1.1 47.36,15.18 45.73,16.82 43.95,16.82 43.49,17.27 43.49,18.43 42.56,19.36 41.13,19.36 39.93,20.56 33.87,20.56 v33.02,19.72
CLK7M  (via drill 0.35)
  Top 0.152: IC8.16 13.74,3.17 v13.76,3.19
  Bottom 0.152: v13.76,3.19 13.76,5.42 20.33,11.98 20.33,13.98 IC1.38
CLK28M  (via drill 0.35)
  Top 0.152: IC8.12 11.12,3.27 v11.14,3.29
  Bottom 0.152: v11.14,3.29 11.14,9.87 IC1.34
CRESET_B  (via drill 0.35)
  Top 0.152: IC10.66 34.96,18.45 v34.21,19.2 | v47.87,10.28 RN1.1
  Bottom 0.152: 47.87,13.94 47.87,14.23 45.6,16.5 43.78,16.5 43.17,17.11 43.17,18.3 42.43,19.04 41,19.04 39.79,20.25 35.26,20.25 v34.21,19.2 | 47.87,13.94 v47.87,10.28 | 47.87,13.94 56.63,13.94 JP1.2
DMAL  (via drill 0.35)
  Top 0.152: IC7.14 4.38,33.26 v4.39,33.24
  Bottom 0.152: v4.39,33.24 13.75,33.24 IC1.18
DRA0  (via drill 0.35)
  Top 0.152: v26.78,3.23 26.78,1.34 IC12.14
  Bottom 0.152: v26.78,3.23 26.78,10.27 IC1.43
DRA1  (via drill 0.35)
  Top 0.152: v26.11,2.71 26.1,2.7 IC12.13
  Bottom 0.152: IC1.44 27.89,13.92 27.89,12.33 26.09,10.53 26.09,2.73 v26.11,2.71
DRA2  (via drill 0.35)
  Top 0.152: v28.07,3.57 28.07,1.33 IC12.16
  Bottom 0.152: IC1.45 31.75,10.64 28.05,6.94 28.05,3.59 v28.07,3.57
DRA3  (via drill 0.35)
  Top 0.152: v27.38,2.65 IC12.15
  Bottom 0.152: IC1.46 30.47,13.96 30.47,10.23 27.38,7.14 v27.38,2.65
DRA4  (via drill 0.35)
  Top 0.152: v29.35,3.51 IC12.18
  Bottom 0.152: IC1.47 34.29,11.27 29.35,6.33 v29.35,3.51
DRA5  (via drill 0.35)
  Top 0.152: IC12.17 28.69,2.6 v28.7,2.61
  Bottom 0.152: v28.7,2.61 28.7,6.69 33.01,11 33.01,13.96 IC1.48
DRA6  (via drill 0.35)
  Top 0.152: v35.92,2.56 35.92,1.33 IC11.12
  Bottom 0.152: v35.92,2.56 35.92,11.79 IC1.49
DRA7  (via drill 0.35)
  Top 0.152: v35.25,3.24 IC11.11
  Bottom 0.152: v35.25,3.24 35.25,13.66 IC1.50
DRA8  (via drill 0.35)
  Top 0.152: IC11.14 37.22,2.53 37.23,2.55 v37.23,2.58
  Bottom 0.152: v37.23,2.58 37.23,9.53 39.37,11.67 IC1.51
DRA9  (via drill 0.35)
  Top 0.152: v55.63,17.94 56.98,17.94 IC5.11
  Bottom 0.152: IC1.56 55.47,17.78 v55.63,17.94
DRD0  (via drill 0.35)
  Top 0.152: IC6.18 15.78,52.18 v15.79,52.17
  Bottom 0.152: v15.79,52.17 15.79,46.7 13.02,43.93 13.02,39.05 IC1.14
DRD1  (via drill 0.35)
  Top 0.152: v17.07,52.19 IC6.16
  Bottom 0.152: IC1.13 16.51,41.83 15.56,42.78 15.56,44.33 17.09,45.86 17.09,52.17 v17.07,52.19
DRD2  (via drill 0.35)
  Top 0.152: v16.46,52.73 16.46,54.09 IC6.17
  Bottom 0.152: v16.46,52.73 16.46,46.29 13.97,43.81 IC1.12
DRD3  (via drill 0.35)
  Top 0.152: IC6.15 17.73,52.85 v17.76,52.83
  Bottom 0.152: v17.76,52.83 17.76,44.43 IC1.11
DRD4  (via drill 0.35)
  Top 0.152: IC6.14 18.37,52.1 v18.4,52.07
  Bottom 0.152: v18.4,52.07 18.4,43.88 18.1,43.58 18.1,41.59 IC1.10
DRD5  (via drill 0.35)
  Top 0.152: IC6.13 v19.03,52.83 v19.02,52.83
  Bottom 0.152: v19.02,52.83 19.02,43.2 IC1.9
DRD6  (via drill 0.35)
  Top 0.152: IC6.12 19.69,52.19 v19.73,52.16
  Bottom 0.152: IC1.8 21.59,40.7 20.3,41.98 20.3,43.77 19.73,44.35 v19.73,52.16
DRD7  (via drill 0.35)
  Top 0.152: v20.37,52.64 20.32,52.68 IC6.11
  Bottom 0.152: IC1.7 21.59,43.37 20.37,44.59 v20.37,52.64
DRD8  (via drill 0.35)
  Top 0.152: v27.63,52.13 IC2.18
  Bottom 0.152: IC1.6 24.13,41.83 23.18,42.78 23.18,46.19 27.63,50.64 v27.63,52.13
DRD9  (via drill 0.35)
  Top 0.152: v28.34,52.7 28.34,53.92 IC2.17
  Bottom 0.152: v28.34,52.7 28.34,50.57 24.13,46.36 IC1.5
DRD10  (via drill 0.35)
  Top 0.152: IC2.16 28.93,52.13 v28.96,52.1
  Bottom 0.152: IC1.4 26.67,41.83 25.72,42.78 25.72,46.97 28.96,50.21 v28.96,52.1
DRD11  (via drill 0.35)
  Top 0.152: IC2.15 29.59,52.69 v29.61,52.67
  Bottom 0.152: v29.61,52.67 29.61,50.11 26.67,47.16 IC1.3
DRD12  (via drill 0.35)
  Top 0.152: IC2.14 v30.23,52.06 v30.23,52.05
  Bottom 0.152: IC1.2 29.21,41.83 28.26,42.78 28.26,47.59 30.23,49.55 v30.23,52.05
DRD13  (via drill 0.35)
  Top 0.152: v30.86,52.74 30.89,52.78 IC2.13
  Bottom 0.152: v30.86,52.74 30.86,48.81 29.21,47.16 IC1.1
DRD14  (via drill 0.35)
  Top 0.152: IC2.12 31.55,52.09 v31.52,52.05
  Bottom 0.152: v31.52,52.05 31.52,48.28 30.8,47.56 30.8,41.59 IC1.84
DRD15  (via drill 0.35)
  Top 0.152: v32.19,52.69 32.19,53.95 IC2.11
  Bottom 0.152: IC1.83 31.75,47.16 32.19,47.61 v32.19,52.69
F_A1
  Top 0.152: IC10.84 40.84,24.69 41.39,24.14 45.49,24.14 49.08,20.55 IC5.6
F_A2
  Top 0.152: IC5.7 49.05,19.92 45.14,23.82 41.26,23.82 40.89,24.19 IC10.83
F_A3
  Top 0.152: IC10.87 41.37,26.19 41.52,26.34 44.96,26.34 49.45,21.85 IC5.4
F_A4
  Top 0.152: IC5.5 51.13,21.19 49.27,21.19 46,24.46 41.52,24.46 40.79,25.19 IC10.85
F_A5
  Top 0.152: IC5.2 49.36,23.17 45.55,26.98 41.54,26.98 40.83,27.69 IC10.90
F_A6
  Top 0.152: IC5.3 49.34,22.51 45.19,26.66 39.98,26.66 IC10.88
F_A7
  Top 0.152: IC4.8 50.99,29.54 49.66,29.54 49.32,29.2 41.41,29.2 40.92,29.69 IC10.94
F_A8
  Top 0.152: IC4.9 44.87,28.85 44.84,28.88 41.52,28.88 40.83,28.19 IC10.91
F_A9
  Top 0.152: IC4.6 45.46,30.8 44.84,31.42 41.52,31.42 41.29,31.19 IC10.97
F_A10
  Top 0.152: IC4.7 49.33,30.17 48.67,29.52 41.54,29.52 40.87,30.19 IC10.95
F_A11
  Top 0.152: IC10.99 41.41,32.19 41.52,32.08 44.84,32.08 44.86,32.1 IC4.4
F_A12
  Top 0.152: IC10.98 41.34,31.69 41.39,31.74 44.97,31.74 45.59,31.12 49.77,31.12 50.12,31.47 IC4.5
F_A13
  Top 0.152: IC10.104 40.71,34.69 41.12,34.28 45.33,34.28 46.18,33.42 IC4.2
F_A14
  Top 0.152: IC10.102 41.25,33.69 41.52,33.96 45.2,33.96 46.4,32.76 IC4.3
F_A15
  Top 0.152: IC3.9 44.95,41.47 44.84,41.58 43.84,41.58 43.17,40.91 43.17,37.36 42.31,36.5 41.52,36.5 40.71,35.69 IC10.106
F_A16
  Top 0.152: IC3.5 50.58,44.09 50.49,44.17 38.61,44.17 38.19,43.76 38.19,42.76 37.35,41.92 36.78,41.92 35.89,41.03 35.89,39.78 35.96,39.71 IC10.113
F_A17
  Top 0.152: IC3.8 43.9,42.13 42.85,41.09 42.85,37.49 42.18,36.82 41.31,36.82 40.68,36.19 IC10.107
F_A18
  Top 0.152: IC10.114 35.46,39.76 35.57,39.87 35.57,41.16 36.65,42.24 37.22,42.24 37.88,42.89 37.88,43.89 38.48,44.49 49.71,44.49 49.94,44.72 IC3.4
F_A19
  Top 0.152: IC5.8 49.04,19.26 46.38,21.92 41.52,21.92 40.75,22.69 IC10.80
F_A20
  Top 0.152: IC8.5 13.74,8.84 16.26,11.36 17.12,11.36 17.77,12 17.77,13.26 18.49,13.98 21.66,13.98 22.53,14.85 22.53,15.63 22.46,15.7 IC10.41
F_BLIT
  Top 0.152: IC7.4 9.64,31.33 11.77,29.2 17.03,29.2 17.04,29.19 IC10.16
F_CCK
  Top 0.152: IC8.2 15.7,8.76 18.38,11.44 22.56,11.44 23.19,12.07 23.19,15.63 23.46,15.9 IC10.43
F_CCKQ
  Top 0.152: IC12.9 25.47,7.19 25.47,10.98 25.07,11.38 25.07,15.63 24.46,16.24 IC10.45
F_CLK7M
  Top 0.152: IC8.4
  Top 0.203: IC10.21 19.52,26.69 21.67,24.54 21.67,20.89 17.53,16.75 13.52,16.75 8.4,11.63 8.4,6.37 9.3,5.47 13.7,5.47 14.38,6.15 | 14.38,6.15 14.44,6.22 14.44,7.1 IC8.4 | IC8.4 14.38,6.15
F_CLK28M
  Top 0.254: IC8.8 11.79,6.12 11.52,5.86 9.46,5.86 8.79,6.53 8.79,11.47 13.69,16.36 17.7,16.36 22.34,21 22.34,24.59 19.74,27.19 IC10.20
F_DMAL
  Top 0.152: IC7.6 10.11,32.62 10.97,31.76 17.03,31.76 17.46,32.19 IC10.10
F_DRA0
  Top 0.152: IC12.6 27.61,7.38 27.61,15.63 27.06,16.18 26.6,16.18 26.46,16.32 IC10.49
F_DRA1
  Top 0.152: IC12.7 26.76,10.83 25.71,11.88 25.71,15.71 25.96,15.96 IC10.48
F_DRA2
  Top 0.152: IC10.55 29.46,16.32 30.15,15.63 30.15,10.58 28.69,9.12 IC12.4
F_DRA3
  Top 0.152: IC10.52 27.96,11.06 28.05,10.97 IC12.5
F_DRA4
  Top 0.152: IC10.60 31.96,16.47 31.67,16.18 31.36,16.18 30.81,15.63 30.81,9.5 30.01,8.7 IC12.2
F_DRA5
  Top 0.152: IC10.56 29.96,16.27 30.47,15.76 30.47,9.99 29.35,8.87 IC12.3
F_DRA6
  Top 0.152: IC10.62 32.96,15.81 33.01,15.76 33.01,11.65 36.56,8.11 IC11.8
F_DRA7
  Top 0.152: IC10.61 32.46,15.86 32.69,15.63 32.69,11.4 35.9,8.2 IC11.9
F_DRA8
  Top 0.152: IC11.6 37.85,8.14 35.23,10.76 35.23,15.63 34.68,16.18 34.2,16.18 33.96,16.43 IC10.64
F_DRA9
  Top 0.152: IC5.9 48.96,18.6 45.96,21.6 41.36,21.6 40.78,22.19 IC10.79
F_DRD0
  Top 0.152: IC10.4 17.47,35.19 16.9,34.62 13.58,34.62 13.03,35.17 13.03,44.36 15.12,46.45 IC6.2
F_DRD1
  Top 0.152: IC6.3 15.78,46.4 14.92,45.55 14.92,37.14 15.55,36.51 16.91,36.51 17.23,36.19 IC10.2
F_DRD2
  Top 0.152: IC6.4 16.44,46.59 15.25,45.41 15.25,37.28 15.69,36.84 17.04,36.84 17.2,36.69 IC10.1
F_DRD3
  Top 0.152: IC10.144 18.59,38.68 17.67,39.6 17.67,45.99 17.07,46.59 IC6.5
F_DRD4
  Top 0.152: IC6.6 17.73,46.59 19.66,44.66 20.2,44.66 20.33,44.53 20.33,40.12 20.96,39.49 IC10.143
F_DRD5
  Top 0.152: IC6.7 18.37,46.89 19.86,45.39 20.13,45.39 20.65,44.88 20.65,40.25 21.46,39.44 IC10.142
F_DRD6
  Top 0.152: IC10.139 22.96,39.78 22.71,40.04 22.71,44.28 21.19,45.79 20.19,45.79 19.03,46.95 IC6.8
F_DRD7
  Top 0.152: IC6.9 19.69,47.13 20.52,46.3 21.4,46.3 23.11,44.59 23.11,40.25 23.46,39.89 IC10.138
F_DRD8
  Top 0.152: IC10.135 24.96,40.14 25.07,40.25 25.07,44.03 26.98,45.94 IC2.2
F_DRD9
  Top 0.152: IC10.134 25.46,43.97 27.64,46.15 IC2.3
F_DRD10
  Top 0.152: IC10.130 27.46,40.1 27.61,40.25 27.61,44.45 28.33,45.16 28.33,47.88 28.3,47.91 IC2.4
F_DRD11
  Top 0.152: IC10.129 27.96,43.9 28.93,44.87 IC2.5
F_DRD12
  Top 0.152: IC10.124 30.46,44.03 29.59,44.9 IC2.6
F_DRD13
  Top 0.152: IC10.122 31.46,39.6 30.81,40.25 30.81,44.66 30.23,45.24 IC2.7
F_DRD14
  Top 0.152: IC10.120 32.46,39.75 32.71,40.01 32.71,44.48 30.89,46.31 IC2.8
F_DRD15
  Top 0.152: IC10.119 32.96,39.58 33.03,39.65 33.03,45.25 31.55,46.73 IC2.9
F_PAL_NTSC
  Top 0.152: IC10.47 25.46,15.93 25.39,15.86 25.39,11.6 26.1,10.89 IC12.8
F_RGA1
  Top 0.152: IC8.7 12.45,10.61 15.67,13.84 17.02,13.84 18.11,14.92 18.11,15.63 18.66,16.18 20.67,16.18 20.96,16.47 IC10.38
F_RGA2
  Top 0.152: IC8.9 11.12,10.47 14.96,14.3 16.9,14.3 16.96,14.36 17.02,14.36 17.79,15.13 17.79,15.76 18.53,16.5 18.86,16.5 19.56,17.2 IC10.37
F_RGA3
  Top 0.152: IC10.33 17.47,20.69 16.9,21.26 16.12,21.26 15.11,20.25 15.11,19.91 14.41,19.22 14.39,19.24 IC9.3
F_RGA4
  Top 0.152: IC9.2 12.98,18.58 13.24,18.84 16.37,18.84 17.71,20.19 IC10.34
F_RGA5
  Top 0.152: IC9.5 11.96,20.54 13.32,21.9 16.88,21.9 17.67,22.69 IC10.29
F_RGA6
  Top 0.152: IC9.4 11.77,19.9 13.45,21.58 17.03,21.58 17.43,21.18 18.46,21.18 IC10.32
F_RGA7
  Top 0.152: IC9.7 10.41,21.83 12.7,24.12 17.09,24.12 17.66,24.69 IC10.25
F_RGA8
  Top 0.152: IC9.6 10.51,21.2 13.11,23.8 16.9,23.8 17.51,23.19 IC10.28
F_RW
  Top 0.152: IC7.2 9.54,30.01 12.54,27 16.9,27 17.48,27.58 18.36,27.58 IC10.19
GND  (via drill 0.35)  (49 unrouted)
  Top 0.152: IC2.10 32.22,48.16 32.93,48.16 v32.93,48.2 | IC6.10 v21.18,48.27 | v21.18,48.27 | IC7.10 6.83,35.21 v6.83,35.02 | IC9.10 8.29,23.79 v8.29,24.77 | IC8.10 9.76,7.17 v9.76,7.2 | IC12.10 23.99,7.16 v23.99,7.18 | IC5.10 v51.16,17.17 | IC4.10 v51.01,27.51 v51.02,27.51 | IC3.10 v50.87,40.14 | IC10.5 19.76,34.69 v19.77,34.7 | IC10.13 19.61,30.69 v19.92,31 | IC10.14 19.63,30.19 v19.9,29.92 | IC10.69 36.46,18.46 v36.41,18.51 | IC10.53 v28.46,18.65 v28.45,18.66 | IC10.103 v38.47,34.19 | IC10.86 38.45,25.69 v38.44,25.68 | C2.2 v5.72,15.08 v5.73,15.08 | C1.2 v5.46,26.56 | C10.2 12.44,49.19 v12.49,49.14 | C9.2 24.38,48.98 v24.37,48.97 | C8.2 51.66,49.08 v51.62,49.11 | C7.2 51.9,36.68 v51.86,36.72 | C6.2 51.96,26.04 v51.9,26.1 | C5.2 42.87,5.4 v42.87,6.4 | IC11.10 34.5,7.15 v34.46,7.19 | C4.2 v32.6,6.31 v32.59,6.32 | C3.2 18.51,6.25 v18.49,6.27 | IC10.140 22.46,37.38 v22.49,37.35 | IC10.132 26.46,37.38 v26.48,37.37 | U1.4 45.78,2.77 v45.75,2.79 | IC10.127 28.96,37.62 v28.72,37.38 | R1.1 50.86,38.1 v50.87,38.1 | C11.2 11.23,44.22 v11.23,45.61 | C13.2 v1.53,41.06 v1.53,41.05 | C12.2 36.67,48.09 v36.64,48.06
  Top 0.203: IC10.59 v31.46,18.66
  Top 0.406: U2.1 3.96,38.97 v3.94,38.96 | U3.1 v44.44,51.96 v44.44,51.95 | C14.2 47.52,51.86 v47.52,53.06
  Bottom 0.152: C16.2 21.43,26.62 v21.45,26.63 | C15.2 26.03,20.1 v26,20.13 | C18.2 35.94,26.67 v35.94,25.65 | C19.2 v35.75,32.84 | C17.2 26.38,35.49 v26.36,35.48 | C22.2 19.75,18.56 v20.87,18.56 | C23.2 31.8,18.32 v31.46,18.66 | C20.2 19.42,31.49 v19.92,31 | C21.2 28.75,37.41 v28.72,37.38 | C25.2 25.24,23.27 v25.25,23.27 | C24.2 38.72,34.45 v38.47,34.19
  other vias: 32,32.41
  pour GND: 0.13,55.64 59.69,55.64 59.69,0.01 0.12,0.01 0.12,55.64
PAL_NTSC  (via drill 0.35)
  Top 0.152: IC12.12 v25.44,3.2
  Bottom 0.152: v25.44,3.2 v25.43,3.2 25.43,11.32 25.43,11.46 IC1.41
RGA1  (via drill 0.35)
  Top 0.152: IC8.13 v11.79,2.55 v11.79,2.56
  Bottom 0.152: v11.79,2.56 11.79,7.98 IC1.33
RGA2  (via drill 0.35)
  Top 0.152: v10.5,2.65 IC8.11
  Bottom 0.152: IC1.32 10.5,11.77 v10.5,2.65
RGA3  (via drill 0.35)
  Top 0.152: IC9.17 v3.9,19.9 v3.91,19.91
  Bottom 0.152: v3.91,19.91 12.01,19.91 12.94,18.98 15.31,18.98 IC1.31
RGA4  (via drill 0.35)
  Top 0.152: v4.62,19.14 4.52,19.24 IC9.18
  Bottom 0.152: IC1.30 13.12,17.78 11.75,19.14 v4.62,19.14
RGA5  (via drill 0.35)
  Top 0.152: IC9.15 3.81,21.2 v3.83,21.18
  Bottom 0.152: v3.83,21.18 5.99,21.18 6.41,21.6 15.23,21.6 IC1.29
RGA6  (via drill 0.35)
  Top 0.152: IC9.16 4.66,20.54 v4.67,20.55
  Bottom 0.152: v4.67,20.55 13.74,20.55 IC1.28
RGA7  (via drill 0.35)
  Top 0.152: IC9.13 3.75,22.49 v3.79,22.45
  Bottom 0.152: v3.79,22.45 5.24,22.45 6.98,24.19 15.18,24.19 IC1.27
RGA8  (via drill 0.35)
  Top 0.152: v4.61,21.83 IC9.14
  Bottom 0.152: IC1.26 6.73,22.86 5.68,21.81 4.62,21.81 v4.61,21.83
RW  (via drill 0.35)
  Top 0.152: v4.47,30.68 2.25,30.68 IC7.18
  Bottom 0.152: IC1.22 13.28,27.94 13.21,28.01 7.15,28.01 v4.47,30.68
SCK  (via drill 0.35)
  Top 0.152: IC10.70 36.96,19.16 v37.01,19.21 | v50.99,4.04 U1.6 53.21,4.04 53.81,4.64 53.81,6.39 54.98,7.56 JP1.7
  Bottom 0.152: v37.01,19.21 37.41,19.61 38.46,19.61 41.25,16.82 42.56,16.82 43.49,15.89 43.49,13.85 46.29,11.05 46.29,9.46 50.59,5.16 50.59,4.43 v50.99,4.04
SDI  (via drill 0.35)
  Top 0.152: v37.1,13.88 36.68,14.3 36.44,14.3 35.89,14.85 35.89,15.63 35.96,15.7 IC10.68 | U1.2 v45.74,5.31 v45.74,5.3
  Bottom 0.152: v37.1,13.88 38.43,15.21 38.43,15.63 38.98,16.18 42.3,16.18 42.85,15.63 42.85,13.58 44.9,11.53 44.9,6.15 v45.74,5.3 49.58,1.47 55.47,1.47 57.87,3.86 JP1.10
SDO  (via drill 0.35)
  Top 0.152: IC10.67 35.46,19.1 v35.48,19.12 | U1.5 53.43,2.77 v53.5,2.7
  Bottom 0.152: v35.48,19.12 36.28,19.93 39.66,19.93 40.87,18.72 42.3,18.72 42.85,18.17 42.85,16.98 43.65,16.18 45.47,16.18 47.01,14.63 47.01,9.19 50.91,5.29 51.85,4.34 51.85,3.19 52.35,2.7 v53.5,2.7 53.5,5.45 54.5,6.44 56.64,6.44 57.76,7.56 JP1.8
SS  (via drill 0.35)
  Top 0.152: IC10.71 37.46,18.33 v38.19,19.06 | v45.65,6.58 U1.1 47.66,6.58 50.49,9.41 RN1.2
  Bottom 0.152: v38.19,19.06 40.74,16.5 42.43,16.5 43.17,15.76 43.17,13.71 45.22,11.66 45.22,7.01 v45.65,6.58 50.29,1.94 54.37,1.94 55.33,2.89 JP1.9
VCC1.2V  (via drill 0.35)
  Top 0.152: IC10.126 29.46,35.78 v29.51,35.73 | IC10.54 28.96,18.4 28.99,18.43 28.99,19.71 v29.02,19.74 | IC10.40 21.96,19.7 v22.02,19.76 | IC10.111 36.96,37.49 v36.4,36.93 | v45.61,39.35 46.57,39.35 R1.2 | IC10.92 36.9,28.69 v35.92,29.67
  Top 0.203: IC10.27 20.81,23.69 v20.84,23.66
  Top 0.406: U3.4 U3.2 | C14.1 47.6,47.92 v47.58,47.91 | U3.4 44.26,47.17 v44.3,47.21 | U3.4 39.93,47.17 v39.91,47.19
  Bottom 0.152: v45.61,39.35 38.82,39.35 v36.4,36.93 35.75,36.28 C19.1 | C16.1 v20.85,23.65 v20.84,23.66 | C15.1 29.02,20.07 v29.02,19.74 | C17.1 29.37,35.6 v29.51,35.73 | C18.1 35.9,29.64 v35.92,29.67 | C25.1 22.02,20.05 v22.02,19.76
  Bottom 0.203: v44.3,47.21 45,47.91 v47.58,47.91
  pour PWR (isolate 0.305): 38.82,49.09 45,49.09 45.98,48.11 45.98,44.7 37.28,36.01 37.28,21.75 34.78,19.25 20.94,19.25 20.6,19.58 20.6,34.45 22.06,35.91 22.67,36.52 29.99,36.52 32.03,36.52 33.23,37.72 33.58,38.07 33.58,46.6 35.98,49.01 38.59,49.01
VCC3.3V  (via drill 0.35)  (34 unrouted)
  Top 0.152: IC9.20 v2.51,17.26 | IC8.20 v17,1.33 v17.01,1.32 | IC10.108 38.7,36.69 v38.69,36.67 | IC12.20 31.41,1.32 v31.41,1.28 | IC11.20 41.89,1.31 v41.89,1.29 | IC5.20 v57,24.56 | v57,24.56 | IC4.20 v56.86,34.9 v56.85,34.9 | IC3.20 v56.71,47.69 | IC7.20 v2.24,28.61 v2.25,28.61 | IC2.20 v25.54,53.97 v25.54,53.96 | IC6.20 13.62,54.11 v13.62,54.08 | C3.1 v18.52,2.22 | v1.63,15.19 2.5,15.19 C2.1 | C1.1 1.43,26.56 v1.4,26.59 | C10.1 12.39,52.24 v12.39,53.22 | C9.1 24.33,52.11 v24.33,53.02 | C8.1 55.62,49.08 v55.64,49.07 | C7.1 55.93,36.68 v55.95,36.7 | C6.1 56.02,26.04 v56.06,26.08 | C5.1 42.98,2.23 v42.93,2.18 | C4.1 32.62,3.25 v32.62,2.27 | RN1.8 RN1.7 RN1.6 RN1.5 52.12,12.02 v52.7,12.02 | IC10.72 38.49,17.2 v38.62,17.33 | U1.8 v51.32,6.58 v51.31,6.57 | IC10.30 v19.67,22.19 v19.68,22.2 | IC10.6 19.43,34.19 v19.85,33.77 | IC10.123 v30.96,37.38 v30.97,37.37 | C13.1 v1.53,46.29 | C12.1 v36.67,53.03 v36.66,53.04
  Top 0.203: IC10.57 30.46,18.39 v30.21,18.64 | IC10.100 39.93,32.67 v38.25,32.67
  Top 0.406: v6.29,48.14 6.27,48.12 U2.4 U2.2 6.27,39.1 v6.25,39.08 | U3.3 39.82,52.03 v39.86,51.99
  Bottom 0.152: C22.1 19.33,21.86 v19.68,22.2 | C23.1 29.8,18.22 v30.21,18.64 | C20.1 19.04,33.77 v19.85,33.77 | C21.1 30.75,37.59 v30.97,37.37 | C24.1 38.47,32.45 v38.25,32.67
  pour PWR (rank 2): 0,55.54 59.71,55.54 59.71,0 -0.01,0 -0.01,55.54
VCC5V  (via drill 0.35)
  Top 0.152: C11.1 11.25,40.29 v11.27,40.27
  Top 0.406: v8.53,38.98 8.53,40.51 U2.3
  pour PWR: 8.11,42.79 17.74,42.79 17.76,42.77 18.44,42.08 18.44,37.14 17.5,36.2 17.19,36.2 10.41,36.2 9.48,37.14 7.99,38.63 7.99,42.79

## Text on the board
tNames: ReAgnus Rev 0 / (C) 2020 S. J. Leary